# Altium PCB LCD-SW-SD.PcbDoc
Units mm, origin at the board's own origin, x right, y up, seen from the top; angles counter-clockwise.
Board outline 202.5 x 123.5 mm, 2 copper layers (Top Layer, Bottom Layer); 22 components, 53 nets, 200 pads, 9 vias.
Unrouted connection lines stored in the file: 42.
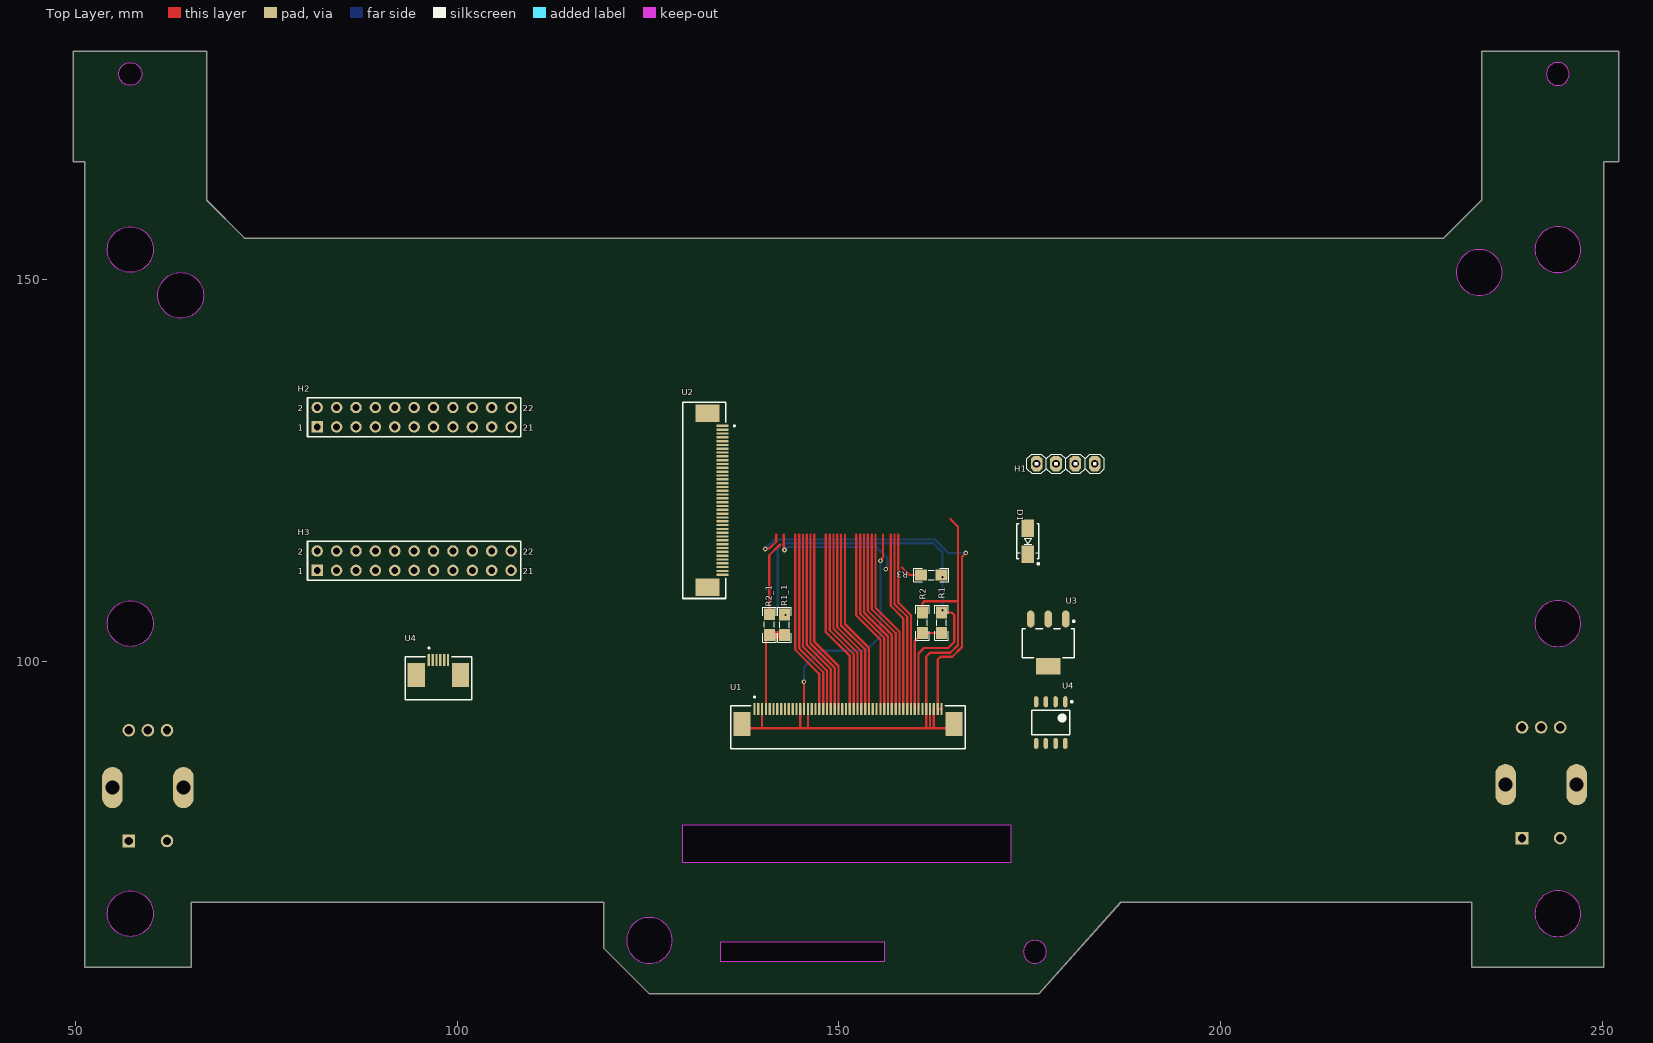
[diagram p0: Top Layer view]
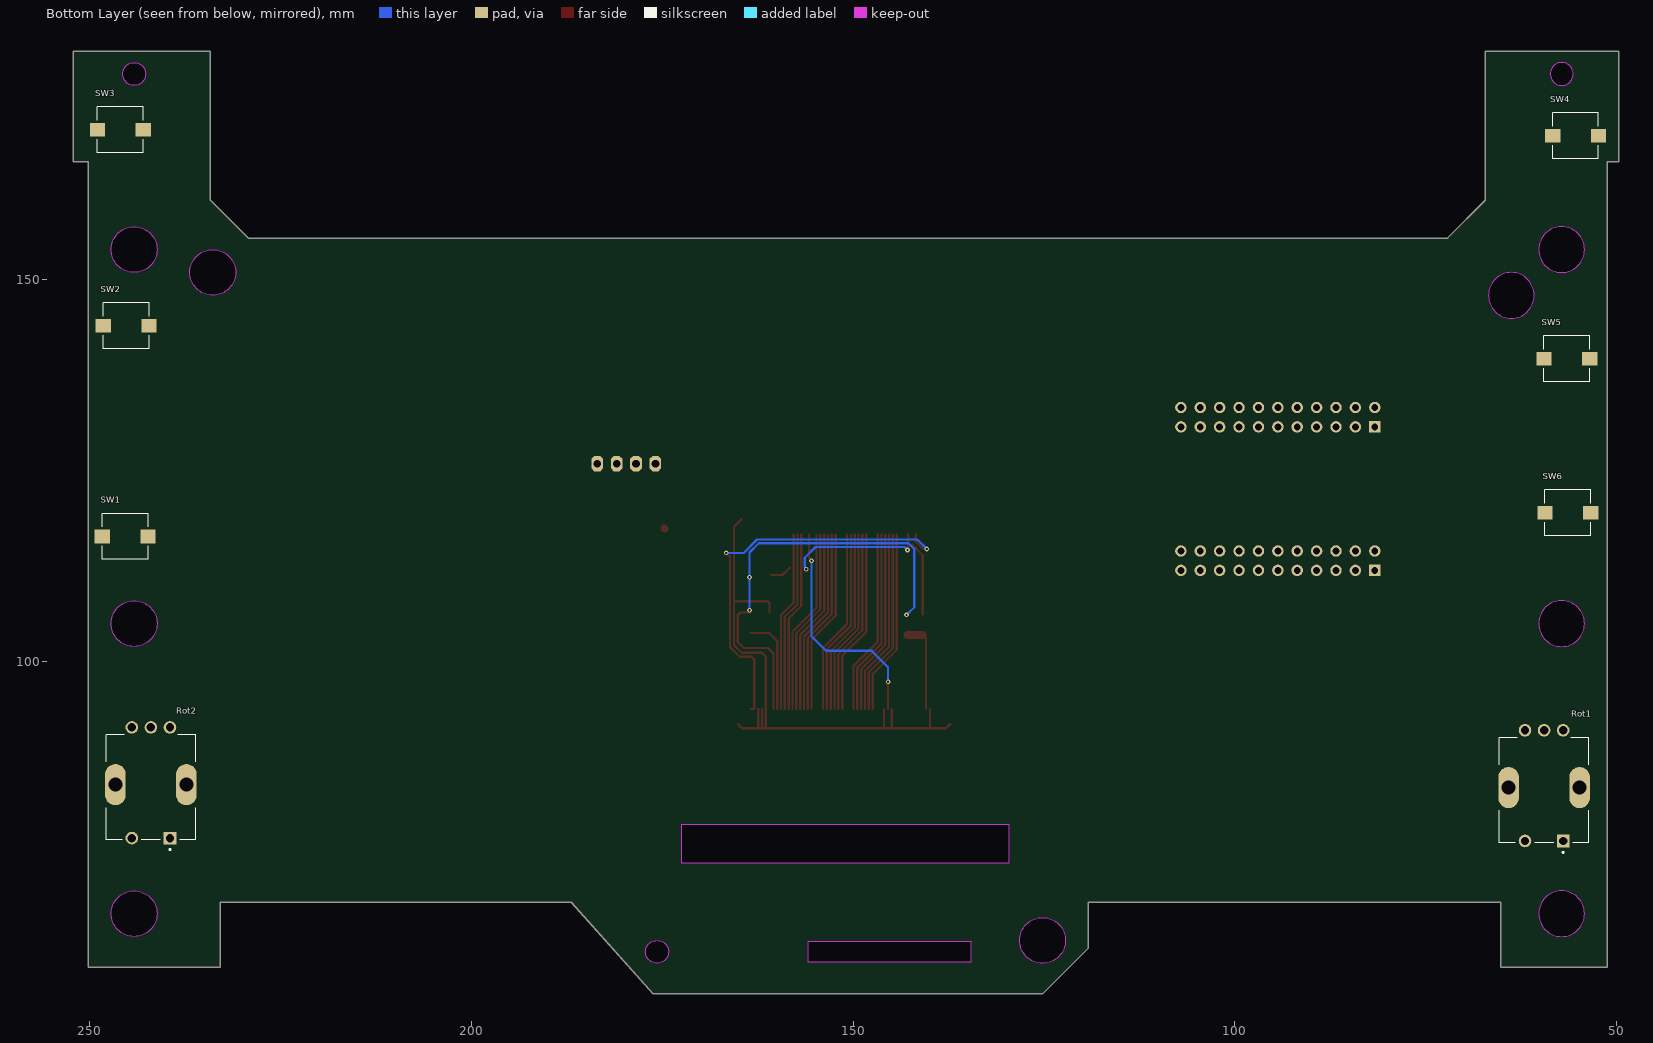
[diagram p1: Bottom Layer view, seen from below]
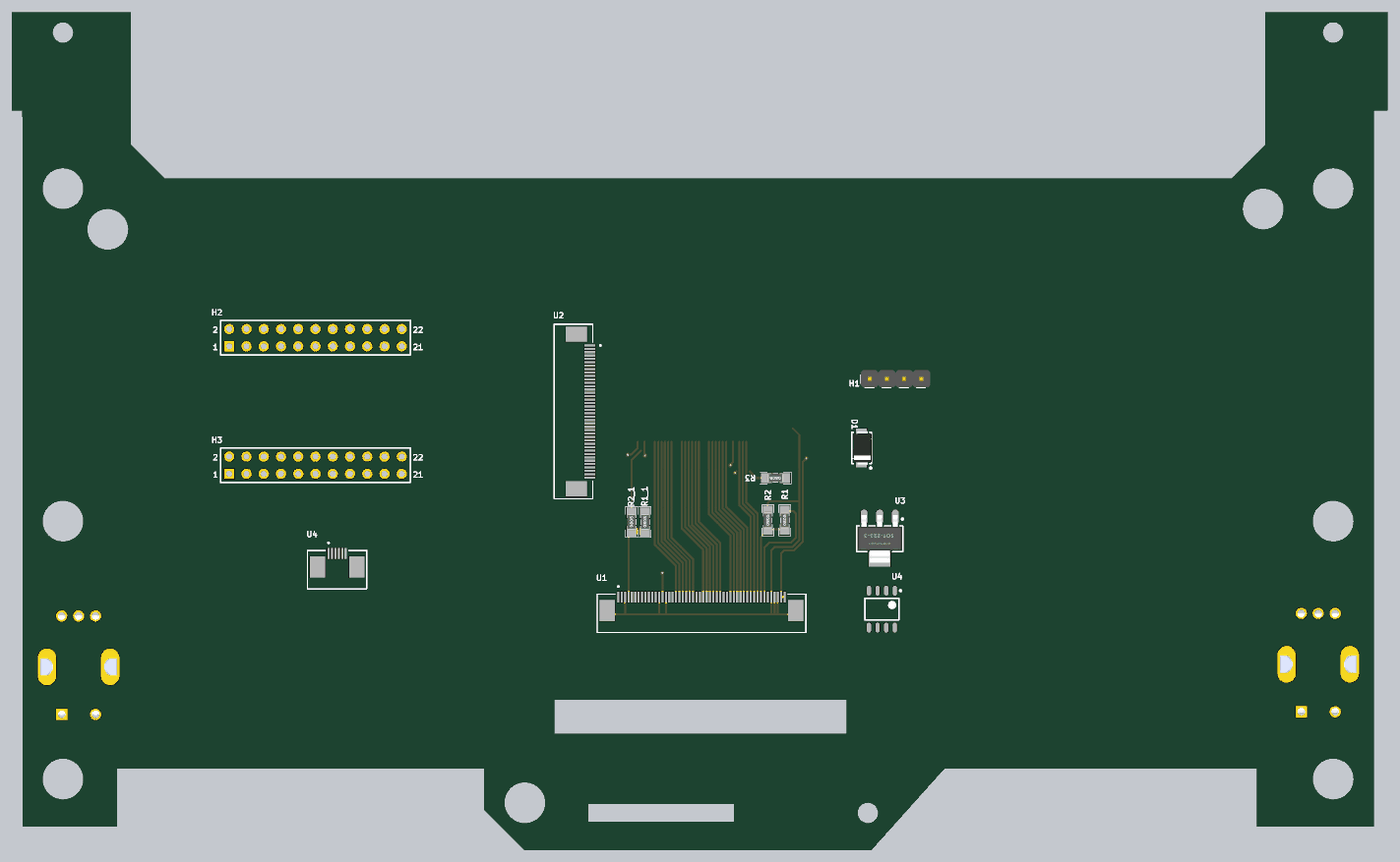
[diagram p2: 3D render of the assembled board from above, using the file's embedded part models]

## Layer stack, top to bottom
Top Solder: solder mask 0.0102, Solder Resist, Dk 3.5
Top Layer: signal copper 0.0356
Dielectric 1: dielectric 0.32, FR-4, Dk 4.8
Bottom Layer: signal copper 0.0356
Bottom Solder: solder mask 0.0102, Solder Resist, Dk 3.5

## Board outline
65.18,59.911 65.18,68.411 119.18,68.411 119.18,62.411 125.18,56.411 176.18,56.411 186.93,68.411 232.93,68.411 232.93,59.911 250.18,59.911 250.18,165.411 252.18,165.411 252.18,179.911 234.18,179.911 234.18,160.361 229.23,155.411 72.13,155.411 67.18,160.361 67.18,179.911 49.68,179.911 49.68,165.411 51.18,165.411 51.18,59.911
cut-out: 134.495,60.63 134.495,63.204 155.956,63.204 155.956,60.63
cut-out: 242.68,176.911 ccw(c244.18,176.911) 244.18,175.411 ccw(c244.18,176.911) 245.68,176.911 ccw(c244.18,176.911) 244.18,178.411 ccw(c244.18,176.911)
cut-out: 230.88,150.911 ccw(c233.88,150.911) 233.88,147.911 ccw(c233.88,150.911) 236.88,150.911 ccw(c233.88,150.911) 233.88,153.911 ccw(c233.88,150.911)
cut-out: 241.18,153.911 ccw(c244.18,153.911) 244.18,150.911 ccw(c244.18,153.911) 247.18,153.911 ccw(c244.18,153.911) 244.18,156.911 ccw(c244.18,153.911)
cut-out: 241.18,104.911 ccw(c244.18,104.911) 244.18,101.911 ccw(c244.18,104.911) 247.18,104.911 ccw(c244.18,104.911) 244.18,107.911 ccw(c244.18,104.911)
cut-out: 241.18,66.911 ccw(c244.18,66.911) 244.18,63.911 ccw(c244.18,66.911) 247.18,66.911 ccw(c244.18,66.911) 244.18,69.911 ccw(c244.18,66.911)
cut-out: 174.18,61.911 ccw(c175.68,61.911) 175.68,60.411 ccw(c175.68,61.911) 177.18,61.911 ccw(c175.68,61.911) 175.68,63.411 ccw(c175.68,61.911)
cut-out: 122.18,63.411 ccw(c125.18,63.411) 125.18,60.411 ccw(c125.18,63.411) 128.18,63.411 ccw(c125.18,63.411) 125.18,66.411 ccw(c125.18,63.411)
cut-out: 129.542,73.584 129.542,78.584 172.542,78.584 172.542,73.584
cut-out: 57.18,175.411 cw(c57.18,176.911) 55.68,176.911 cw(c57.18,176.911) 57.18,178.411 cw(c57.18,176.911) 58.68,176.911 cw(c57.18,176.911)
cut-out: 63.78,144.911 cw(c63.78,147.911) 60.78,147.911 cw(c63.78,147.911) 63.78,150.911 cw(c63.78,147.911) 66.78,147.911 cw(c63.78,147.911)
cut-out: 57.18,150.911 cw(c57.18,153.911) 54.18,153.911 cw(c57.18,153.911) 57.18,156.911 cw(c57.18,153.911) 60.18,153.911 cw(c57.18,153.911)
cut-out: 57.18,101.911 cw(c57.18,104.911) 54.18,104.911 cw(c57.18,104.911) 57.18,107.911 cw(c57.18,104.911) 60.18,104.911 cw(c57.18,104.911)
cut-out: 57.18,63.911 cw(c57.18,66.911) 54.18,66.911 cw(c57.18,66.911) 57.18,69.911 cw(c57.18,66.911) 60.18,66.911 cw(c57.18,66.911)

## Design rules (kind name [scope] priority, off if disabled: settings)
Clearance [All] p1: gap=0.2 ignorepadtopadclearanceinfootprint=FALSE
ComponentClearance [All] p1: gap=0 collisioncheckmode=3 verticalgap=2540 showdistances=FALSE
Height [All] p1: minheight=0 maxheight=1000 prefheight=12.7
PolygonConnect [All] p1: connectstyle=Relief reliefconductorwidth=0.254 reliefentries=4 polygonreliefangle="90 Angle" airgapwidth=0.254
RoutingVias [All] p1: holewidth=0.6 width=0.3 viastyle="Through Hole" minholewidth=0.1 minwidth=0.1 maxholewidth=10 maxwidth=10
SolderMaskExpansion [All] p1: expansion=0.102 istentingtop=FALSE
Width [All] p1: maxlimit=10 minlimit=0.1 preferedwidth=0.3
28 further rules are at their usual default settings.

## Components (designator, comment, footprint, x,y, rotation, side; value= is the part's Value field where it differs from the comment)
D1 "Comment" DIOM4629X24N 174.752,115.697 r270 top
H1 "Comment" My_1X04 179.705,125.857 r0 top
H2 "Comment" HDR2X11 81.661,130.683 r0 top
H3 "Comment" HDR2X11 81.661,111.887 r0 top
R1 "Comment" RESC3413X04N 163.449,105.029 r90 top
R1_1 "Comment" RESC3413X04N 142.875,104.775 r90 top
R2 "Comment" RESC3413X04N 160.954,105.037 r90 top
R2_1 "Comment" RESC3413X04N 140.888,104.783 r90 top
R3 "Comment" RESC3413X04N 162.089,111.277 r180 top
Rot1 "Comment" SW_482016514001 59.485,83.439 r90 bottom
Rot2 "Comment" SW_482016514001 241.984,83.82 r90 bottom
SW1 "Comment" SW_TL9210AF180Q 245.364,116.332 r180 bottom
SW2 "Comment" SW_TL9210AF180Q 245.227,143.936 r180 bottom
SW3 "Comment" SW_TL9210AF180Q 245.989,169.59 r180 bottom
SW4 "Comment" SW_TL9210AF180Q 55.362,168.828 r180 bottom
SW5 "Comment" SW_TL9210AF180Q 56.505,139.618 r180 bottom
SW6 "Comment" SW_TL9210AF180Q 56.378,119.425 r180 bottom
U1 "Comment" SAMTEC_ZF5S-50-01-T-WT 151.189,91.746 r0 top
U2 "Comment" SAMTEC_ZF5S-40-02-T-WT 132.767,121.066 r270 top
U3 "Comment" SOT223 177.419,102.314 r270 top
U4 "Comment" SAMTEC_ZF5S-06-01-T-WT 97.536,98.171 r0 top
U4 "Comment" SOIC127P600X175-8N 177.747,91.948 r270 top

## Footprints (in the part's own frame and the unit in brackets; to place one, negate y for a bottom-side part, rotate by r counter-clockwise, add the part's x,y. Pads: shape width x height; smd on the part's side, far side on the other; paste and mask are expansions set on the pad)
DIOM4629X24N [mm] "Molded Diode, 2-Leads, Body 4/60x2/90mm, IPC Medium Density-Design:Abbas Basereh"
  rect 2.3x1.6 smd: 1(-1.7,0) 2(1.7,0)
  silkscreen extent -2.3,-1.45 3.07,1.48, body extent -2.5,-1.22 2.5,1.48, height 2.2
HDR2X11 [mm] "Connector; Header; 11x2 Position"
  rect 1.5x1.5 hole 0.9: 1(0,0)
  round 1.5 hole 0.9: 2(0,2.54) 3(2.54,0) 4(2.54,2.54) 5(5.08,0) 6(5.08,2.54) 7(7.62,0) 8(7.62,2.54) 9(10.16,0) 10(10.16,2.54) 11(12.7,0) 12(12.7,2.54) 13(15.24,0) 14(15.24,2.54) 15(17.78,0) 16(17.78,2.54) 17(20.32,0) 18(20.32,2.54) 19(22.86,0) 20(22.86,2.54) 21(25.4,0) 22(25.4,2.54)
  silkscreen extent -1.27,-1.27 26.67,3.81
My_1X04 [mil]
  oct 60x80 hole 40: 1(-150,0) 2(-50,0) 3(50,0) 4(150,0)
  silkscreen extent -200,-50 200,50, body extent -198,-49 202,51, height 234
RESC3413X04N [mm] "Chip Resistor, 2-Leads, Body 3/40x1/30mm, IPC Medium Density-Design:Abbas Basereh"
  rect 1.55x1.45 smd: 1(-1.35,0) 2(1.35,0)
  silkscreen extent -2.29,-0.89 2.29,0.89, body extent -1.25,-0.62 1.25,0.62, height 0.79
SAMTEC_ZF5S-06-01-T-WT [mm]
  rect 0.3x1.6 smd: 01(-1.25,1.98) 02(-0.75,1.98) 03(-0.25,1.98) 04(0.25,1.98) 05(0.75,1.98) 06(1.25,1.98)
  rect 2.24x3.12 smd: S1(-2.897,0) S2(2.897,0)
  silkscreen extent -4.37,-3.25 4.37,3.64
SAMTEC_ZF5S-40-02-T-WT [mm]
  rect 0.3x1.6 smd: 01(-9.75,1.98) 02(-9.25,1.98) 03(-8.75,1.98) 04(-8.25,1.98) 05(-7.75,1.98) 06(-7.25,1.98) 07(-6.75,1.98) 08(-6.25,1.98) 09(-5.75,1.98) 10(-5.25,1.98) 11(-4.75,1.98) 12(-4.25,1.98) 13(-3.75,1.98) 14(-3.25,1.98) 15(-2.75,1.98) 16(-2.25,1.98) 17(-1.75,1.98) 18(-1.25,1.98) 19(-0.75,1.98) 20(-0.25,1.98) 21(0.25,1.98) 22(0.75,1.98) 23(1.25,1.98) 24(1.75,1.98) 25(2.25,1.98) 26(2.75,1.98) 27(3.25,1.98) 28(3.75,1.98) 29(4.25,1.98) 30(4.75,1.98) 31(5.25,1.98) 32(5.75,1.98) 33(6.25,1.98) 34(6.75,1.98) 35(7.25,1.98) 36(7.75,1.98) 37(8.25,1.98) 38(8.75,1.98) 39(9.25,1.98) 40(9.75,1.98)
  rect 2.24x3.12 smd: S1(-11.397,0) S2(11.397,0)
  silkscreen extent -12.87,-3.25 12.87,3.64
SAMTEC_ZF5S-50-01-T-WT [mm]
  rect 0.3x1.6 smd: 01(-12.25,1.98) 02(-11.75,1.98) 03(-11.25,1.98) 04(-10.75,1.98) 05(-10.25,1.98) 06(-9.75,1.98) 07(-9.25,1.98) 08(-8.75,1.98) 09(-8.25,1.98) 10(-7.75,1.98) 11(-7.25,1.98) 12(-6.75,1.98) 13(-6.25,1.98) 14(-5.75,1.98) 15(-5.25,1.98) 16(-4.75,1.98) 17(-4.25,1.98) 18(-3.75,1.98) 19(-3.25,1.98) 20(-2.75,1.98) 21(-2.25,1.98) 22(-1.75,1.98) 23(-1.25,1.98) 24(-0.75,1.98) 25(-0.25,1.98) 26(0.25,1.98) 27(0.75,1.98) 28(1.25,1.98) 29(1.75,1.98) 30(2.25,1.98) 31(2.75,1.98) 32(3.25,1.98) 33(3.75,1.98) 34(4.25,1.98) 35(4.75,1.98) 36(5.25,1.98) 37(5.75,1.98) 38(6.25,1.98) 39(6.75,1.98) 40(7.25,1.98) 41(7.75,1.98) 42(8.25,1.98) 43(8.75,1.98) 44(9.25,1.98) 45(9.75,1.98) 46(10.25,1.98) 47(10.75,1.98) 48(11.25,1.98) 49(11.75,1.98) 50(12.25,1.98)
  rect 2.24x3.12 smd: S1(-13.897,0) S2(13.897,0)
  silkscreen extent -15.37,-3.25 15.37,3.64
SOIC127P600X175-8N [mm] "SOIC, 8-Leads, Body 4.91x3.90mm, Pitch 1.27mm, IPC Medium Density"
  oval 1.45x0.6 smd: 1(-2.725,1.905) 2(-2.725,0.635) 3(-2.725,-0.635) 4(-2.725,-1.905) 5(2.725,-1.905) 6(2.725,-0.635) 7(2.725,0.635) 8(2.725,1.905)
  silkscreen extent -2.85,-2.5 1.6,2.88, body extent -2,-2.5 2,2.5, height 1.76
SOT223 [mm] "SOT223, 4-Leads, Body 6.5x3.5mm, Pitch 2.30mm-Designer Abbas Basereh"
  oval 2.2x1 smd: 1(-3.2,2.3) 2(-3.2,0) 3(-3.2,-2.3)
  rect 2.2x3.2 smd: 4(3,0)
  Top Layer pour cut-out: -1.7,3.556 1.7,3.556 1.7,-3.556 -1.7,-3.556
  silkscreen extent -3.02,-3.4 1.9,3.48, body extent -3.5,-3.25 3.5,3.25, height 1.7
SW_482016514001 [mm]
  rect 1.65x1.65 hole 1.1: 1(-7,-2.5)
  round 1.65 hole 1.1: 2(-7,2.5) A(7.5,-2.5) B(7.5,2.5) C(7.5,0)
  oval 5.4x2.7 hole 1.8: S1(0,4.65) S2(0,-4.65)
  silkscreen extent -8.6,-5.85 6.5,5.85, body extent -7.25,-5.85 7.6,5.85, height 26.6
SW_TL9210AF180Q [mm]
  rect 2x1.8 smd: 1(-3,0) 2(3,0)
  silkscreen extent -3,-3 3,3

## Via types
v1: diameter 0.6, hole 0.3, Top Layer to Bottom Layer, 9 vias

## Nets (pads, with @x,y where several pads share a name; then routed paths per layer and width w, separated by ;. In a path a pad name is that pad's centre, name@x,y a point inside that pad or via, vN(x,y) a via of type N, cw(c..) or ccw(c..) an arc to the next point about the centre after c; other vN are vias at no path point)
3V3: R1.2 R1_1.2 R3.1 U1.44 | length 56.9
  Top Layer w0.3: U1.44 160.439,101.003 161.163,101.727 164.338,101.727 165.1,102.489 165.1,106.045 164.766,106.379 R1.2
  Bottom Layer w0.3: v1(143.002,106.045) 141.986,107.061 141.986,114.681 142.74,115.435 162.369,115.435 163.576,114.228 v1(163.576,106.68)
  other v1: 163.576,110.998
9V: H1.4
12V: D1.2 H1.3
AVDD: U1.08
BLUE0: U1.39 U2.13 | length 24.2
  Top Layer w0.3: 154.788,116.586 154.788,106.997 157.939,103.846 U1.39
BLUE1: U1.38 U2.14 | length 24.2
  Top Layer w0.3: 154.288,116.586 154.288,106.79 157.439,103.639 U1.38
BLUE2: U1.37 U2.15 | length 24.2
  Top Layer w0.3: 153.788,116.586 153.788,106.582 156.939,103.431 U1.37
BLUE3: U1.36 U2.16 | length 24.2
  Top Layer w0.3: 153.288,116.586 153.288,106.375 156.439,103.224 U1.36
BLUE4: U1.35 U2.17 | length 24.2
  Top Layer w0.3: 152.788,116.586 152.788,106.168 155.939,103.017 U1.35
BLUE5: U1.34 U2.18 | length 24.2
  Top Layer w0.3: 152.288,116.586 152.288,105.961 155.439,102.81 U1.34
BLUE6: U1.33
BLUE7: U1.32
BLUE8: 
BLUE9: 
DCLK: U1.14 U2.11 | length 30.7
  Top Layer w0.3: v1(145.415,97.282) 145.439,97.258 U1.14 ; v1(155.448,113.157) 155.448,113.238 155.788,113.578 155.788,116.586
  Bottom Layer w0.3: v1(145.415,97.282) 145.415,99.187 147.574,101.346 153.543,101.346 155.448,103.251 v1(155.448,113.157)
DE: U1.42 U2.07 | length 23.5
  Top Layer w0.3: 157.788,116.586 157.788,107.659 159.439,106.008 U1.42
DITHB: R1_1.1 R2_1.1 U1.04 | length 11.9
  Top Layer w0.3: U1.04 140.439,102.984 R2_1.1 R2_1.1@140.895,103.425
  Top Layer w1: R2_1.1@140.895,103.425 R1_1.1
GND: H1.1 R2.2 R2_1.2 U1.03 U1.13 U1.15 U1.46 U1.47 U1.48 U1.S1 U1.S2 U2.05 U2.12 U2.19 U2.20 U2.27 U2.28 U2.35 U2.36 U2.38 U2.S1 U2.S2 | length 87.7
  Top Layer w0.3: U1.S1 137.852,91.186 139.954,91.186 ; U1.03 139.939,91.201 139.954,91.186 ; R2_1.2 140.888,113.868 142.288,115.268 ; U1.13 144.939,91.218 144.907,91.186 ; U1.15 145.939,91.202 145.923,91.186 ; R2.2 160.954,107.614 161.163,107.823 165.608,107.823 ; U1.47 161.939,91.2 161.925,91.186 ; U1.48 162.439,91.186 ; 164.644,118.566 165.608,117.602 165.608,107.823 ; U1.S2 164.526,91.186 162.439,91.186 ; 139.954,91.186 144.907,91.186 ; 144.907,91.186 145.923,91.186 ; 145.923,91.186 161.439,91.186 ; 161.439,91.186 U1.46 161.439,100.606 161.925,101.092 164.592,101.092 165.608,102.108 165.608,107.823 ; 161.439,91.186 161.925,91.186 ; 161.925,91.186 162.439,91.186
GREEN0: U1.31 U2.21 | length 24.2
  Top Layer w0.3: 150.788,116.586 150.788,104.863 153.939,101.712 U1.31
GREEN1: U1.30 U2.22 | length 24.2
  Top Layer w0.3: 150.288,116.586 150.288,104.656 153.439,101.505 U1.30
GREEN2: U1.29 U2.23 | length 24.2
  Top Layer w0.3: 149.788,116.586 149.788,104.449 152.939,101.298 U1.29
GREEN3: U1.28 U2.24 | length 24.2
  Top Layer w0.3: 149.288,116.586 149.288,104.242 152.439,101.091 U1.28
GREEN4: U1.27 U2.25 | length 24.2
  Top Layer w0.3: 148.788,116.586 148.788,104.035 151.939,100.884 U1.27
GREEN5: U1.26 U2.26 | length 24.2
  Top Layer w0.3: 148.288,116.586 148.288,103.807 151.439,100.656 U1.26
GREEN6: U1.25
GREEN7: U1.24
GREEN8: 
HSYNC: U1.40 U2.09 | length 23.5
  Top Layer w0.3: 156.788,116.586 156.788,107.245 158.439,105.594 U1.40
LEDA: U1.49 U1.50 U2.39 | length 53.7
  Top Layer w0.3: v1(140.335,114.681) 140.392,114.738 140.885,114.738 141.788,115.641 141.788,116.586 ; U1.50 U1.49 162.939,100.201 163.322,100.584 164.846,100.584 166.116,101.854 166.116,113.665 v1(166.624,114.173)
  Bottom Layer w0.3: v1(140.335,114.681) 141.589,115.935 162.576,115.935 164.338,114.173 v1(166.624,114.173)
LR: U1.12
MODE: R1.1 R2.1 U1.43 | length 12.9
  Top Layer w0.3: U1.43 159.939,102.622 160.954,103.637 R2.1 163.441,103.687 R1.1
MOE: 
RED0: U1.23 U2.29 | length 24.2
  Top Layer w0.3: 146.788,116.586 146.788,102.513 149.939,99.362 U1.23
RED1: U1.22 U2.30 | length 24.2
  Top Layer w0.3: 146.288,116.586 146.288,102.306 149.439,99.155 U1.22
RED2: U1.21 U2.31 | length 24.2
  Top Layer w0.3: 145.788,116.586 145.788,102.099 148.939,98.948 U1.21
RED3: U1.20 U2.32 | length 24.2
  Top Layer w0.3: 145.288,116.586 145.288,101.892 148.439,98.741 U1.20
RED4: U1.19 U2.33 | length 24.2
  Top Layer w0.3: 144.788,116.586 144.788,101.685 147.939,98.534 U1.19
RED5: U1.18 U2.34 | length 24.2
  Top Layer w0.3: 144.288,116.586 144.288,101.477 147.439,98.326 U1.18
RED6: U1.17
RED7: U1.16
RED8: 
RESET: U1.07
UD: U1.11
VCC: R3.2 U2.06 U2.10 U2.37 | length 21
  Top Layer w0.3: 142.788,116.586 142.788,114.722 142.875,114.635 v1(142.875,114.554) ; v1(156.138,112.014) 156.138,112.095 v1@156.288,112.245 ; 158.288,112.222 159.233,111.277 R3.2
  Bottom Layer w0.3: v1(142.875,114.554) 143.256,114.935 154.94,114.935 156.337,113.538 156.337,112.294 156.138,112.095 v1(156.138,112.014)
VGH: U1.10
VGL: U1.09
VIN: D1.1 H1.2 | length 0.1
  Top Layer w1: D1.1@174.689,117.333 D1.1
VSYNC: U1.41 U2.08 | length 23.5
  Top Layer w0.3: 157.288,116.586 157.288,107.452 158.939,105.801 U1.41
X1: U2.04
X2: U2.02
X3: 
Y1: U2.03
Y2: U2.01
pads on no net: H2.1 H2.2 H2.3 H2.4 H2.5 H2.6 H2.7 H2.8 H2.9 H2.10 H2.11 H2.12 H2.13 H2.14 H2.15 H2.16 H2.17 H2.18 H2.19 H2.20 H2.21 H2.22 H3.1 H3.2 H3.3 H3.4 H3.5 H3.6 H3.7 H3.8 H3.9 H3.10 H3.11 H3.12 H3.13 H3.14 H3.15 H3.16 H3.17 H3.18 H3.19 H3.20 H3.21 H3.22 Rot1.1 Rot1.2 Rot1.A Rot1.B Rot1.C Rot1.S1 Rot1.S2 Rot2.1 Rot2.2 Rot2.A Rot2.B Rot2.C Rot2.S1 Rot2.S2 SW1.1 SW1.2 SW2.1 SW2.2 SW3.1 SW3.2 SW4.1 SW4.2 SW5.1 SW5.2 SW6.1 SW6.2 U1.01 U1.02 U1.05 U1.06 U1.45 U2.40 U3.1 U3.2 U3.3 U3.4 U4.1 U4.01 U4.2 U4.02 U4.03 U4.3 U4.04 U4.4 U4.05 U4.5 U4.06 U4.6 U4.7 U4.8 U4.S1 U4.S2

## Other copper
Top Layer:
  pour cut-out: 54.18,66.911 cw(c57.18,66.911) 57.18,69.911 cw(c57.18,66.911) 60.18,66.911 cw(c57.18,66.911) 57.18,63.911 cw(c57.18,66.911)

## Silkscreen, mask and mechanical layers (free items; w line width, h text height)
Mechanical 1:
  circle w0.3: c57.18,176.911 r1.5
  circle w0.3: c57.18,153.911 r3
  circle w0.3: c57.18,66.911 r3
  circle w0.3: c175.68,61.911 r1.5
  circle w0.3: c244.18,104.911 r3
  circle w0.3: c233.88,150.911 r3
  circle w0.3: c244.18,153.911 r3
  circle w0.3: c244.18,66.911 r3
  circle w0.3: c244.18,176.911 r1.5
  circle w0.3: c125.18,63.411 r3
  circle w0.3: c57.18,104.911 r3
  circle w0.3: c63.78,147.911 r3
  lines w0.3: 49.68,165.411 51.18,165.411 51.18,59.911 65.18,59.911 65.18,68.411 119.18,68.411 119.18,62.411 125.18,56.411 176.18,56.411 186.93,68.411 232.93,68.411 232.93,59.911 250.18,59.911 250.18,165.411 252.18,165.411 252.18,179.911 234.18,179.911 234.18,160.361 229.23,155.411 72.13,155.411 67.18,160.361 67.18,179.911 49.68,179.911 49.68,165.411 ; 129.542,73.584 129.542,78.584 172.542,78.584 172.542,73.584 129.542,73.584 ; 134.495,60.63 155.956,60.63 155.956,63.246 134.495,63.246 134.495,60.63

## Text inside footprints (layer, text, board x,y; h text height)
H2: Top Overlay "22" at 108.585,132.715 h0.8; Top Overlay "21" at 108.585,130.175 h0.8; Top Overlay "2" at 79.121,132.715 h0.8; Top Overlay "1" at 79.121,130.175 h0.8
H3: Top Overlay "22" at 108.585,113.919 h0.8; Top Overlay "21" at 108.585,111.379 h0.8; Top Overlay "2" at 79.121,113.919 h0.8; Top Overlay "1" at 79.121,111.379 h0.8